# EAGLE board BC40M_nrf53 (EAGLE 9.6.2)
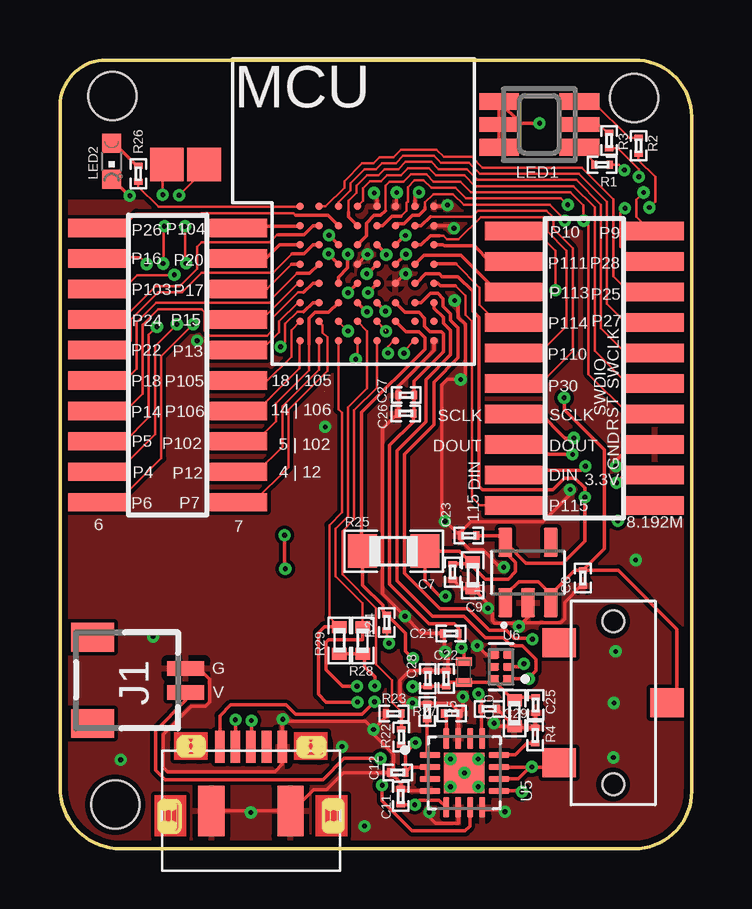
[diagram p0: board, top side]
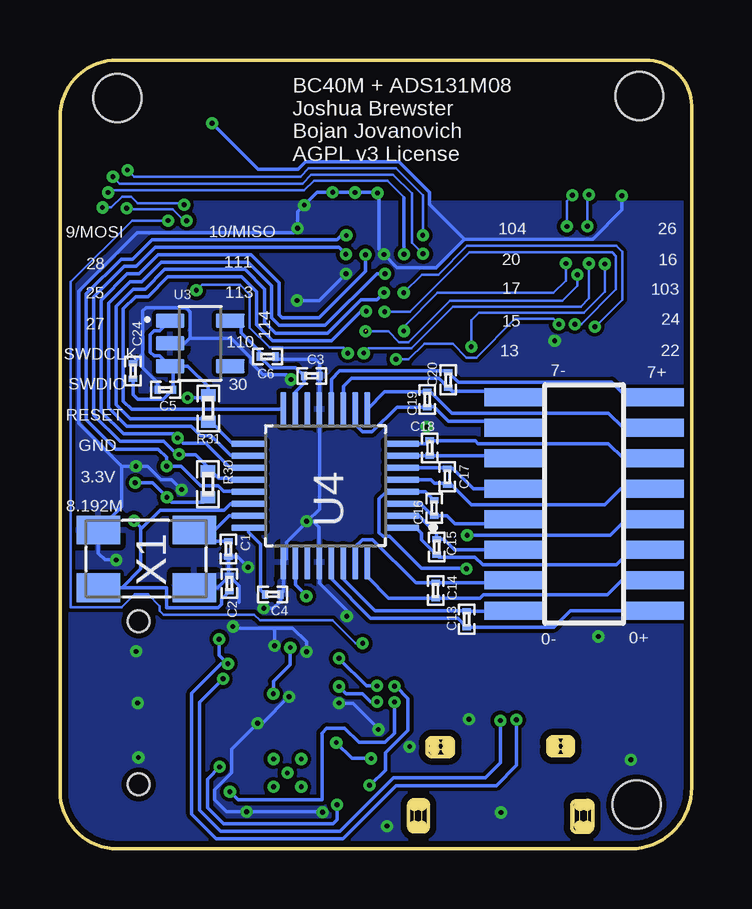
[diagram p1: board, bottom side, seen from below]

Size 26.34 x 32.87 mm. Coordinates in mm from the lower left corner, seen from the top.
Outline: 4.13,1.84 arc-90 4.37,2.02 4.78,2.01 arc-90 5.01,1.78 5.01,0.91 arc-90 4.78,0.68 4.37,0.68 arc-90 4.13,0.96 4.13,1.84
Outline: 10.98,1.81 arc-90 11.21,2.04 11.57,2.04 arc-90 11.8,1.81 11.8,0.93 arc-90 11.57,0.71 11.21,0.71 arc-90 10.98,0.93 10.98,1.81
Outline: 5.16,3.87 arc-90 4.94,4.1 4.94,4.44 arc-90 5.16,4.67 5.78,4.67 arc-90 6.01,4.44 6.01,4.1 arc-90 5.78,3.87 5.16,3.87
Outline: 10.16,3.84 arc-90 9.93,4.07 9.93,4.41 arc-90 10.16,4.64 10.82,4.64 arc-90 11.05,4.41 11.05,4.06 arc-90 10.82,3.84 10.16,3.84
Outline: 0,30.96 arc-90 1.94,32.87 23.94,32.87 arc-90 26.34,30.5 26.34,2.4 arc-90 23.94,0 2.55,0 arc-90 0,2.56 0,30.96
Copper layers (1*16): Top 0.035mm / dielectric 1.5mm / Bottom 0.035mm
Design rules "default *": minimum track width 4mil, minimum drill 0.2mm, track to track 6mil, track to pad 6mil, pad to pad 6mil, via to via 6mil, smd to smd 6mil, copper to edge 10mil, drill to drill 6mil, minimum pad ring 6mil, minimum via ring 6mil, stop-mask expansion 4mil, vias tented up to drill 20mil, thermal gap 10mil
Holes 2 mm at 2.19,31.37 23.94,31.29 2.31,1.84

## Footprints (pad centres in the part's own frame; a part is rotated, then mirrored left to right if it is on the bottom)
0201 = smd 0.25 x 0.35: 1 -0.325,0; 2 0.325,0
0402 = smd 0.5 x 0.6: 1 -0.55,0; 2 0.55,0
1365-20 = smd 0.76 x 2.4: 1 -5.715,-2.95; 2 -5.715,2.95; 3 -4.445,-2.95; 4 -4.445,2.95; 5 -3.175,-2.95; 6 -3.175,2.95; 7 -1.905,-2.95; 8 -1.905,2.95; 9 -0.635,-2.95; 10 -0.635,2.95; 11 0.635,-2.95; 12 0.635,2.95; 13 1.905,-2.95; 14 1.905,2.95; 15 3.175,-2.95; 16 3.175,2.95; 17 4.445,-2.95; 18 4.445,2.95; 19 5.715,-2.95; 20 5.715,2.95
0402_COILCRAFT = smd 0.356 x 0.66: P$1 -0.432,0; P$2 0.432,0
SM02B-SRSS-TB(LF)(SN) = smd 0.6 x 1.55: 1 -0.5,1.975; 2 0.5,1.975 | smd 1.2 x 1.8: 3 -1.8,-1.9; 4 1.8,-1.9
GM5WA94310A = smd 0.7 x 1.65: 1 -0.95,-1.675; 3 0.95,-1.675; 4 0.95,1.675; 6 -0.95,1.675 | smd 0.6 x 1.65: 2 0,-1.675; 5 0,1.675
CHIPLED_0603 = smd 0.8 x 0.8: A 0,-0.75; C 0,0.75
BC40M = smd 0.305 x 0.305: A0 1.168,6.579; A1 1.168,5.766; A2 1.168,4.978; A3 1.168,4.166; A4 1.168,3.378; A5 1.168,2.565; A6 1.168,1.778; A7 1.168,0.965; B0 1.956,6.579; B1 1.956,5.766; B2 1.956,4.978; B3 1.956,4.166; B4 1.956,3.378; B5 1.956,2.565; B6 1.956,1.778; B7 1.956,0.965; C0 2.769,6.579; C1 2.769,5.766; C2 2.769,4.978; C3 2.769,4.166; C4 2.769,3.378; C5 2.769,2.565; C6 2.769,1.778; C7 2.769,0.965; D0 3.556,6.579; D1 3.556,5.766; D2 3.556,4.978; D3 3.556,4.166; D4 3.556,3.378; D5 3.556,2.565; D6 3.556,1.778; D7 3.556,0.965; E0 4.369,6.579; E1 4.369,5.766; E2 4.369,4.978; E3 4.369,4.166; E4 4.369,3.378; E5 4.369,2.565; E6 4.369,1.778; E7 4.369,0.965; F0 5.156,6.579; F1 5.156,5.766; F2 5.156,4.978; F3 5.156,4.166; F4 5.156,3.378; F5 5.156,2.565; F6 5.156,1.778; F7 5.156,0.965; G0 5.969,6.579; G1 5.969,5.766; G2 5.969,4.978; G3 5.969,4.166; G4 5.969,3.378; G5 5.969,2.565; G6 5.969,1.778; G7 5.969,0.965; H0 6.756,6.579; H1 6.756,5.766; H2 6.756,4.978; H3 6.756,4.166; H4 6.756,3.378; H5 6.756,2.565; H6 6.756,1.778; H7 6.756,0.965
TP14SQ = smd 1.4 x 1.4: TP 0,0
0805 = smd 1.2 x 1.4: 1 -1.3,0; 2 1.3,0
CL-SB-12B = smd 1.2 x 1.4: 1 -2.5,-2.25; 2 0,2.25; 3 2.5,-2.25 | hole 0.9: 3.4,0; -3.4,0
SOT95P280X145-5N = smd 1.21 x 0.59: 1 -1.255,0.95; 2 -1.255,0; 3 -1.255,-0.95; 4 1.255,-0.95; 5 1.255,0.95
DX4R005JJ2R1800 = smd 1.35 x 0.4: 1 1.525,1.3; 2 1.525,0.65; 3 1.525,0; 4 1.525,-0.65; 5 1.525,-1.3 | smd 2.1 x 1.1: MP1 -1.15,1.65; MP2 -1.15,-1.65
QFP50P700X700X120-32N = smd 1.44 x 0.26: 1 -3.195,1.75; 2 -3.195,1.25; 3 -3.195,0.75; 4 -3.195,0.25; 5 -3.195,-0.25; 6 -3.195,-0.75; 7 -3.195,-1.25; 8 -3.195,-1.75; 17 3.195,-1.75; 18 3.195,-1.25; 19 3.195,-0.75; 20 3.195,-0.25; 21 3.195,0.25; 22 3.195,0.75; 23 3.195,1.25; 24 3.195,1.75 | smd 0.26 x 1.44: 9 -1.75,-3.195; 10 -1.25,-3.195; 11 -0.75,-3.195; 12 -0.25,-3.195; 13 0.25,-3.195; 14 0.75,-3.195; 15 1.25,-3.195; 16 1.75,-3.195; 25 1.75,3.195; 26 1.25,3.195; 27 0.75,3.195; 28 0.25,3.195; 29 -0.25,3.195; 30 -0.75,3.195; 31 -1.25,3.195; 32 -1.75,3.195
QFN50P300X300X100-17N = smd 0.86 x 0.26: 1 -1.435,0.75; 2 -1.435,0.25; 3 -1.435,-0.25; 4 -1.435,-0.75; 9 1.435,-0.75; 10 1.435,-0.25; 11 1.435,0.25; 12 1.435,0.75 | smd 0.26 x 0.86: 5 -0.75,-1.435; 6 -0.25,-1.435; 7 0.25,-1.435; 8 0.75,-1.435; 13 0.75,1.435; 14 0.25,1.435; 15 -0.25,1.435; 16 -0.75,1.435 | smd 1.68 x 1.68: 17 0,0 | drill 0.2 pad 0.4: 18 0,0; 19 -0.58,0.58; 20 0.58,0.58; 21 -0.58,-0.58; 22 0.58,-0.58
PSON50P145X100X60-6N = smd 0.42 x 0.3: 1 -0.29,0.5 | smd 0.41 x 0.3: 2 -0.295,0; 3 -0.295,-0.5; 4 0.295,-0.5; 5 0.295,0; 6 0.295,0.5
ABM3B-8.000MHZ-B2-T = smd 1.8 x 1.2: 1 -2,-1.2; 2 2,-1.2; 3 2,1.2; 4 -2,1.2
1365-16 = smd 0.76 x 2.4: 1 -4.445,-2.95; 2 -4.445,2.95; 3 -3.175,-2.95; 4 -3.175,2.95; 5 -1.905,-2.95; 6 -1.905,2.95; 7 -0.635,-2.95; 8 -0.635,2.95; 9 0.635,-2.95; 10 0.635,2.95; 11 1.905,-2.95; 12 1.905,2.95; 13 3.175,-2.95; 14 3.175,2.95; 15 4.445,-2.95; 16 4.445,2.95

## Placement (x,y rotation side)
C1  10pF  [0201]  19.32,12.49 270 bottom
C2  10pF  [0201]  19.28,11.05 90 bottom
C3  1uF  [0201]  15.84,19.71 180 bottom
C4  220nF  [0201]  17.48,10.6 0 bottom
C5  1uF  [0201]  21.94,19.13 180 bottom
C6  1uF  [0201]  17.69,20.51 0 bottom
C7  1uF  [0201]  16.37,11.53 90 top
C8  1uF  [0201]  21.8,11.28 90 top
C9  10uF  [0402]  17.21,11.4 90 top
C10  1uF  [0201]  17.9,5.83 180 top
C11  4.7uF  [0201]  14.21,2.18 270 top
C12  4.7uF  [0201]  14.08,3.18 0 top
C13  100pF  [0201]  9.39,9.57 90 bottom
C14  100pF  [0201]  10.68,10.76 90 bottom
C15  100pF  [0201]  10.64,12.58 90 bottom
C16  100pF  [0201]  10.74,14.2 270 bottom
C17  100pF  [0201]  10.19,15.5 90 bottom
C18  100pF  [0201]  10.92,16.7 270 bottom
C19  100pF  [0201]  11.03,18.72 270 bottom
C20  100pF  [0201]  10.15,19.54 270 bottom
C21  0.1uF  [0201]  16.3,8.97 180 top
C22  10nF  [0201]  16.1,7.1 270 top
C23  0.1uF  [0201]  17.04,13.05 0 top
C24  1uF  [0201]  23.29,19.91 270 bottom
C25  4.7uF  [0201]  19.83,6 90 top
C26  4.7uF  [0201]  14.41,18.14 0 top
C27  0.1uF  [0201]  14.43,18.9 0 top
C28  0.1uF  [0201]  15.34,7.09 270 top
C29  10uF  [0402]  18.96,5.65 90 top
HDR1  1365-20  [1365-20]  4.49,20.15 270 top
HDR2  1365-20  [1365-20]  21.86,20.02 270 top
I1  120Ω/500mAh  [0402_COILCRAFT]  16.85,7.37 270 top
J1  SM02B-SRSS-TB(LF)(SN)  [SM02B-SRSS-TB(LF)(SN)]  3.27,7.02 270 top
LED1  GM5WA94310A  [GM5WA94310A]  19.98,30.19 90 top
LED2  [CHIPLED_0603]  2.15,28.65 180 top
MCU  BC40M  [BC40M]  8.84,20.2 0 top
NFC1  TPTP14SQ  [TP14SQ]  6.01,28.51 180 top
NFC2  TPTP14SQ  [TP14SQ]  4.46,28.51 0 top
R1  3.3kΩ  [0201]  22.6,28.5 180 top
R2  3.3kΩ  [0201]  24.12,29.29 90 top
R3  3.3kΩ  [0201]  22.9,29.51 90 top
R4  1.18kΩ  [0201]  19.82,4.71 270 top
R5  1.13kΩ  [0201]  16.33,5.64 180 top
R22  348kΩ  [0201]  14.23,4.66 90 top
R23  750kΩ  [0201]  13.92,5.63 180 top
R24  100kΩ  [0201]  13.63,9.43 90 top
R25  0Ω  [0805]  13.91,12.4 0 top
R26  3.3kΩ  [0201]  3.27,28.13 90 top
R27  10kΩ  [0201]  15.31,5.72 270 top
R28  10kΩ  [0402]  12.62,8.68 90 top
R29  10kΩ  [0402]  11.65,8.69 90 top
R30  100kΩ  [0402]  20.17,15.19 270 bottom
R31  100kΩ  [0402]  20.16,18.35 90 bottom
S1  CL-SB-12B-01T  [CL-SB-12B]  23.06,6.08 270 top
U1  LP5907MFX-3.3/NOPB  [SOT95P280X145-5N]  19.51,11.51 90 top
U2  DX4R005JJ2R1800  [DX4R005JJ2R1800]  7.96,2.73 90 top
U3  LP5907MFX-3.3/NOPB  [SOT95P280X145-5N]  20.5,21.06 0 bottom
U4  ADS131M08IPBS  [QFP50P700X700X120-32N]  15.28,15.13 180 bottom
U5  BQ24072RGTR  [QFN50P300X300X100-17N]  16.86,3.16 0 top
U6  TPD4S012DRYR  [PSON50P145X100X60-6N]  18.39,7.58 180 top
X1  ABM3B-8.000MHZ-B2-T  [ABM3B-8.000MHZ-B2-T]  22.74,12.08 180 bottom
X5  1365-16  [1365-16]  4.49,14.37 90 bottom

## Library data of the parts
C1-C29 R1-R3 R5 R22-R31 = standardparts
HDR1 HDR2 X5 = con-leotronics; OC_FARNELL: unknown; OC_NEWARK: unknown
I1 = spkfncoils; MOUSER_PART: 994-0402HP-12NXGLU; PROD_ID: NDUC-15271
J1 = SM02B-SRSS-TB_LF__SN_; AVAILABILITY: In Stock; DESCRIPTION: Connector Header Surface Mount, Right Angle 2 position 0.039 (1.00mm); MF: JST Sales; MP: SM02B-SRSS-TB(LF)(SN); PACKAGE: None; PRICE: None
LED1 = led
LED2 = adafruit
MCU = BC40M-V0-lib2
NFC1 NFC2 = testpad
R4 = standardparts; SPICEPREFIX: R
S1 = CL-SB-12B-01T; AVAILABILITY: In Stock; DESCRIPTION: Slide Switch SPDT Surface Mount; MF: Nidec Copal; MP: CL-SB-12B-01T; PACKAGE: None; PRICE: None
U1 U3 = LP5907MFX-3.3_NOPB; AVAILABILITY: Unavailable; DESCRIPTION: Linear Voltage Regulator IC 1 Output 250mA SOT-23-5; MF: Texas Instruments; MP: LP5907MFX-3.3/NOPB; PACKAGE: SOT-23 Texas Instruments; PRICE: None
U2 = DX4R005JJ2R1800; AVAILABILITY: In Stock; DESCRIPTION: USB - micro B USB 2.0 Receptacle Connector 5 Position Surface Mount, Right Angle; Through Hole; MF: JAE Electronics; MP: DX4R005JJ2R1800; PACKAGE: None; PRICE: None
U4 = ADS131M08IPBS; AVAILABILITY: Warning; DESCRIPTION: 24-bit 32-kSPS 8-channelsimultaneous-sampling delta-sigma ADC 32-TQFP -40 to 125; MF: Texas Instruments; MP: ADS131M08IPBS; PACKAGE: TQFP-32 Texas Instruments; PRICE: None; PURCHASE-URL: https://pricing.snapeda.com/search/part/ADS131M08IPBS/?ref=eda
U5 = BQ24072RGTR; AVAILABILITY: In Stock; DESCRIPTION: Standalone 1-cell 1.5-A linear charger, Power Path, 4.2-V VBAT and VOUT=VBAT + 225mV 16-VQFN -40 to 85; MF: Texas Instruments; MP: BQ24072RGTR; PACKAGE: VQFN-16 Texas Instruments; PRICE: None; PURCHASE-URL: https://pricing.snapeda.com/search/part/BQ24072RGTR/?ref=eda
U6 = TPD4S012DRYR; AVAILABILITY: In Stock; DESCRIPTION: 4-channel USB ESD solution with power clamp 6-SON -40 to 85; MF: Texas Instruments; MP: TPD4S012DRYR; PACKAGE: USON-6 Texas Instruments; PRICE: None; PURCHASE-URL: https://pricing.snapeda.com/search/part/TPD4S012DRYR/?ref=eda
X1 = Crystals_Oscillators; CREATED_BY: PCBLayout.com; DIGIKEY_PART_NUMBER: 535-9720-2-ND; MANUFACTURER: Abracon LLC; MPN: ABM3B-8.000MHZ-B2-T; PACKAGE: SMD 4

## Nets
0N: C13.2 U4.30 X5.2
0P: C13.1 U4.29 X5.1
1N: C14.2 U4.31 X5.4
1P: C14.1 U4.32 X5.3
2N: C15.2 U4.2 X5.6
2P: C15.1 U4.1 X5.5
3N: C16.2 U4.3 X5.8
3P: C16.1 U4.4 X5.7
4N: C17.2 U4.6 X5.10
4P: C17.1 U4.5 X5.9
5N: C18.2 U4.7 X5.12
5P: C18.1 U4.8 X5.11
6N: C19.2 U4.10 X5.14
6P: C19.1 U4.9 X5.13
7N: C20.2 U4.11 X5.16
7P: C20.1 U4.12 X5.15
+5V: C22.2 C25.2 C28.2 C29.2 I1.P$2 U2.1 U6.6
+5V_ISO: C10.2 C21.1 C26.2 C27.2 I1.P$1 MCU.F5 U5.13
AVDD: C3.2 C6.1 U3.5 U4.15
BAT: C12.2 J1.2 R22.1 U5.2 U5.3
CAP: C4.1 U4.24
CHG: MCU.C7 R29.2 U5.9
CLKIN: C1.1 U4.23 X1.1
CLKOUT: C2.1 HDR2.20 U4.22 X1.3
CS: MCU.E4 R31.1 U4.17
CUR_DETECT: MCU.E7 R22.2 R23.1
D+: MCU.H5 U2.3 U6.1
D-: MCU.G5 U2.2 U6.2
DIN: HDR2.17 MCU.F2 U4.21
DOUT: HDR2.15 MCU.F3 R30.1 U4.20
DRDY: MCU.E3 U4.18
GND: C1.2 C2.2 C3.1 C4.2 C5.2 C6.2 C7.1 C8.1 C9.1 C10.1 C11.1 C12.1 C21.2 C22.1 C23.1 C24.1 C25.1 C26.1 C27.1 C28.1 C29.1 HDR2.16 J1.1 LED1.4 LED1.5 LED1.6 LED2.C MCU.D3 MCU.E0 MCU.F0 MCU.F4 MCU.G0 MCU.H0 MCU.H1 MCU.H7 R4.1 R5.1 R23.2 R27.1 U1.2 U2.5 U2.MP1 U2.MP2 U3.2 U4.13 U4.25 U4.28 U5.4 U5.6 U5.8 U5.15 U6.4 X1.2 X1.4
ID: U2.4
ILM: R4.2 U5.12
ISET: R5.2 U5.16
LED5: LED2.A R26.2
N$1: LED1.2 R3.2
N$2: LED1.3 R2.2
N$3: LED1.1 R1.2
NFC1: MCU.F7 NFC2.TP
NFC2: MCU.C6 NFC1.TP
P4_AIN0: HDR1.17 MCU.D5
P5_AIN1: HDR1.15 MCU.D4
P6_AIN2: HDR1.19 MCU.D7
P7_AIN3: HDR1.20 MCU.B6
P9_MOSI: HDR2.2 MCU.C4
P10_MISO: HDR2.1 MCU.G7
P12: HDR1.18 MCU.B7
P13: HDR1.10 MCU.A5
P14: HDR1.13 MCU.B4
P15: HDR1.8 MCU.A4
P16: HDR1.3 MCU.B5
P17: HDR1.6 MCU.A3
P18: HDR1.11 MCU.B3
P19: MCU.C3 R3.1
P20: HDR1.4 MCU.A2
P21: MCU.C2 R1.1
P22: HDR1.9 MCU.B2
P24: HDR1.7 MCU.B1
P25_AIN4: HDR2.6 MCU.B0
P26_AIN5: HDR1.1 MCU.C1
P27_AIN6: HDR2.8 MCU.C0
P28_AIN7: HDR2.4 MCU.F1
P29: MCU.E1 R2.1
P30: HDR2.11 MCU.G1
P102: HDR1.16 MCU.C5
P103: HDR1.5 MCU.E6
P104: HDR1.2 MCU.A1
P105: HDR1.12 MCU.A6
P106: HDR1.14 MCU.A7
P109: MCU.A0 R26.1
P110: HDR2.9 MCU.G2
P111: HDR2.3 MCU.H2
P113: HDR2.5 MCU.G3
P114: HDR2.7 MCU.H3
P115: HDR2.19 MCU.H4
PGOOD: MCU.D6 R28.2 U5.7
RESET: HDR2.14 MCU.D2 R24.1
SCLK: HDR2.13 MCU.E2 U4.19
SWDCLK: HDR2.10 MCU.D1
SWDIO: HDR2.12 MCU.D0
SYNC/RESET: MCU.E5 U4.16
TMR: U5.14
TS: R27.2 U5.1
VDD: C7.2 C9.2 C23.2 HDR2.18 MCU.G4 R25.2 R30.2 U1.5 U4.26
VDDH: MCU.F6 R24.2 R25.1 R28.1 R29.1
VIN: C5.1 C8.2 C24.2 R31.2 S1.2 U1.1 U1.3 U3.1 U3.3
VSWITCH: C11.2 S1.3 U5.5 U5.10 U5.11

## Tracks (layer width: path | path; a pad name or v marks a point on that pad's centre or on a via)
0N
  Bottom 0.152: X5.2 7.48,9.92 7.5,9.91 9.37,9.91 C13.2 9.41,9.92 13.21,9.92 14.53,11.24 U4.30
0P
  Bottom 0.152: X5.1 5.06,9.92 5.74,9.24 C13.1 | U4.29 15.03,11.24 13.39,9.6 9.75,9.6 C13.1 | C13.1
1N
  Bottom 0.152: X5.4 7.55,11.09 C14.2 11.5,11.09 13.3,12.88 13.73,12.88 14.05,12.57 14.05,11.96 U4.31
1P
  Bottom 0.152: U4.32 13.53,11.33 12.64,10.44 C14.1 8.83,10.44 8.68,10.59 3.51,10.59 2.91,11.19 X5.3
2N
  Bottom 0.152: U4.2 11.37,13.89 11.13,13.65 11.13,13.63 10.64,13.13 C15.2 10.33,12.9 9.89,12.46 X5.6
2P
  Bottom 0.152: X5.5 2.52,12.46 3.15,11.83 8.72,11.83 9.03,12.15 10.54,12.15 C15.1 11.26,12.87 11.26,13.14 11.5,13.38 U4.1
3N
  Bottom 0.152: X5.8 8.4,13.73 8.59,13.55 9.87,13.55 10.01,13.68 10.2,13.87 C16.2 10.8,13.87 11.33,14.4 12.06,14.4 U4.3
3P  (via drill 0.2)
  Top 0.152: v9.4,11.67 9.36,11.7 v9.36,13.06
  Bottom 0.152: v9.36,13.07 3.39,13.07 2.73,13.73 X5.7 | v9.36,13.07 | C16.1 11.1,14.88 U4.4 12.73,14.88 13.03,14.59 13.03,13.18 12.88,13.02 12.61,13.02 11.27,11.68 v9.4,11.68 v9.4,11.67 | v9.36,13.06 v9.36,13.07
4N
  Bottom 0.152: 8.28,14.98 8.2,15.06 7.49,15.06 X5.10 9.11,15 9.97,15.86 10.15,15.86 C17.2 10.23,15.87 12.07,15.87 U4.6
4P
  Bottom 0.152: X5.9 2.96,15 3.62,14.34 9.19,14.34 10.02,15.18 C17.1 10.24,15.22 10.72,15.22 10.88,15.38 U4.5
5N
  Bottom 0.152: 11.21,16.38 | U4.7 11.21,16.38 | X5.12 8.36,16.27 8.46,16.38 C18.2 11.21,16.38
5P  (1 unrouted)
  Bottom 0.152: X5.11 2.86,16.27 3.47,16.88 8.91,16.88 9.03,17 10.89,17 C18.1 | U4.8 11.11,16.88 10.97,17.03
6N  (1 unrouted)
  Bottom 0.152: C19.2 11.01,18.42 10.75,18.42 10.15,17.81 7.71,17.81 X5.14 | U4.10 14.03,17.67 13.73,17.38 13.32,17.38 12.29,18.41 11.04,18.41
6P  (1 unrouted)
  Bottom 0.152: X5.13 2.86,17.54 3.47,18.15 9.99,18.15 10.89,19.04 C19.1 | U4.9 12.81,19.05 C19.1
7N
  Bottom 0.102: 8.22,18.81 X5.16 | C20.2 10.13,19.19
  Bottom 0.152: U4.11 14.53,19.27 14.19,19.6 10.54,19.6 C20.2 10.01,19.07 8.48,19.07 8.22,18.81
7P
  Bottom 0.152: U4.12 15.03,19.58 14.69,19.92 10.21,19.92 C20.1 9.73,19.44 3.34,19.44 2.71,18.81 X5.15
+5V  (via drill 0.2)
  Top 0.102: C25.2 19.8,6.29
  Top 0.152: v14.71,6.76 C28.2 15.35,6.77 C22.2 16.26,6.93 16.84,6.93 I1.P$2 17.96,6.94 U6.6 18.24,6.93 18.24,6.86 18.9,6.2 C29.2 19.08,6.32 C25.2 | U2.1 6.67,5.55 7.12,6 9.43,6 9.82,5.61 12.6,5.61 v13.12,6.13
  Bottom 0.152: v14.71,6.76 14.41,6.46 13.74,6.46 13.4,6.13 v13.12,6.13
+5V_ISO  (via drill 0.2)
  Top 0.152: MCU.F5 14.39,22.36 14.96,22.36 15.21,22.12 15.21,21.77 15.44,21.54 15.91,21.54 15.98,21.47 15.98,20.72 14.76,19.49 C27.2 | U5.13 17.57,4.64 C10.2 | C10.2 17.57,6.34 v17.45,6.46 | C27.2 | C27.2 14.76,18.16 C26.2 14.74,17.8 13.75,16.81 13.75,11.02 15.38,9.39 16.45,9.39 16.62,9.21 C21.1 16.64,8.96 16.64,8.75 16.85,8.54 I1.P$1 16.85,8.28 v16.74,8.38 | C10.2
  Bottom 0.152: v17.45,6.46 v17.44,6.46 17.44,6.98 16.76,7.67 16.76,8.37 v16.74,8.38
AVDD
  Bottom 0.152: U4.15 16.53,19.04 16.17,19.4 C3.2 16.51,20.05 17.55,20.05 C6.1 18.01,20.73 18.78,21.5 18.78,21.68 18.78,21.94 18.78,21.97 18.82,22.01 U3.5
BAT  (via drill 0.2)
  Top 0.152: U5.3 15.29,3.05 15.29,3.28 U5.2 15.41,3.39 14.62,3.39 C12.2 14.41,4.16 | 14.41,4.16 R22.1 | J1.2 5.24,6.19 3.98,4.93 3.98,3.28 4.38,2.89 10.96,2.89 11.84,3.76 v13.37,3.76 | v14.82,4.43 14.55,4.16 14.41,4.16
  Bottom 0.152: v13.37,3.76 14.16,3.76 v14.82,4.43
CAP
  Bottom 0.152: U4.24 18.47,13.2 17.98,12.7 17.98,10.78 C4.1
CHG  (via drill 0.2)
  Top 0.102: 11.65,9.26 R29.2 11.23,9.65 11.23,13.49 11.76,14.02 11.76,18.16 11.61,18.31 MCU.C7
  Top 0.152: U5.9 19.26,2.41 v19.26,2.38 | v12.4,6.11 11.1,6.11 10.78,6.43 10.78,9.01 11.03,9.26 11.65,9.26
  Bottom 0.152: v19.26,2.38 18.92,2.04 15.42,2.04 15.42,4.82 15.22,5.03 14.48,5.03 13.88,4.43 12.78,4.43 12.4,4.82 v12.4,6.11
CLKIN
  Bottom 0.152: U4.23 19.3,13.88 19.89,13.28 X1.1 20.28,12.82 C1.1
CLKOUT  (via drill 0.2)
  Top 0.152: v23.26,13.68 23.29,13.68 23.92,14.31 HDR2.20
  Bottom 0.152: C2.1 19.61,10.39 19.61,10.19 19.75,10.05 21.9,10.05 21.9,10.88 X1.3 23.76,10.88 22.97,11.67 22.97,13.31 | 22.97,13.31 22.97,13.39 v23.26,13.68 | U4.22 19.24,14.38 19.5,14.11 22.17,14.11 22.97,13.31
CS  (via drill 0.2)
  Top 0.152: MCU.E4 13.21,23.55 v12.84,23.18
  Bottom 0.152: v12.84,23.18 13.13,22.88 13.78,22.88 15.18,21.49 17.36,21.49 17.82,21.95 17.82,23.32 18.63,24.14 21.98,24.14 22.8,23.32 23.3,23.32 24.01,22.61 24.01,18.51 23.42,17.92 20.17,17.92 | 20.17,17.92 19.16,16.9 18.49,16.9 U4.17 | R31.1 20.17,17.81 20.17,17.92
CUR_DETECT
  Top 0.102: 14.17,5.71 R23.1 14.25,5.7 13.85,6.1 13.85,7.03 13.19,7.7 13.19,10.03 11.77,11.44 11.77,13.23 12.27,13.73 12.27,18.27 13.21,19.22 MCU.E7
  Top 0.152: R23.1 14.25,5 R22.2
D+  (via drill 0.2)
  Top 0.152: MCU.H5 15.6,22.52 15.98,22.14 15.98,21.9 16.29,21.6 16.29,20.58 15.26,19.55 15.26,17.8 14.05,16.59 14.05,11.17 15.53,9.7 16.84,9.7 17.74,8.8 18.49,8.8 18.81,8.48 18.96,8.48 18.97,8.47 19.28,8.47 19.85,7.89 19.85,7.41 19.52,7.08 | 19.52,7.08 U6.1 | 19.52,7.08 19.52,7.07 19.53,7.06 v19.55,7.08 | v7.98,5.34 7.98,4.27 U2.3
  Bottom 0.152: v7.98,5.34 7.98,3.58 8.6,2.96 12.44,2.96 14.67,0.73 19.65,0.73 20.53,1.61 20.53,6.1 v19.55,7.08
D-  (via drill 0.2)
  Top 0.152: MCU.G5 15.06,22.76 15.44,23.14 15.76,23.14 15.98,22.92 15.98,22.6 16.29,22.29 16.29,22.03 16.6,21.72 16.6,20.45 15.59,19.45 15.59,17.67 14.36,16.44 14.36,11.48 15.84,10.01 17,10.01 17.91,9.1 18.62,9.1 18.93,8.78 18.99,8.78 19,8.78 19.67,8.78 19.7,8.75 v19.7,8.73 | v19.34,7.72 19.29,7.72 19.15,7.58 U6.2 | v7.32,5.37 U2.2
  Bottom 0.152: v7.32,5.37 7.32,3.47 8.15,2.64 12.33,2.64 14.55,0.41 19.82,0.41 20.85,1.44 20.85,6.48 19.62,7.72 v19.34,7.72 19.7,8.07 v19.7,8.73
DIN  (via drill 0.2)
  Top 0.102: HDR2.17 19.97,15.58 20.17,15.77
  Top 0.152: MCU.F2 14.38,25.56 v14.4,25.56 | v21.9,15.94 21.73,15.77 20.17,15.77
  Bottom 0.152: v14.4,25.56 14.61,25.56 14.79,25.37 22.5,25.37 23.3,24.57 23.8,24.57 25.24,23.12 25.24,17.88 24.02,16.66 22.24,16.66 21.9,16.32 v21.9,15.94 21.29,15.94 20.48,15.13 19.75,15.13 19.52,14.89 18.48,14.89 U4.21
DOUT  (via drill 0.2)
  Top 0.102: HDR2.15 19.92,16.85 20.01,16.76
  Top 0.152: MCU.F3 14.4,24.76 14.41,24.76 v14.42,24.77 | v21.37,16.43 20.34,16.43 20.01,16.76
  Bottom 0.152: v14.42,24.77 14.71,25.06 22.37,25.06 23.17,24.26 23.67,24.26 24.93,23.01 24.93,18.06 23.84,16.97 22.01,16.97 21.47,16.43 v21.37,16.43 21.36,16.42 20.69,16.42 20.13,15.85 | 20.13,15.85 19.72,15.45 19.3,15.45 19.24,15.38 U4.20 | R30.1 20.13,15.78 20.13,15.85
DRDY  (via drill 0.2)
  Top 0.152: MCU.E3 12.82,23.97 v12.79,23.97
  Bottom 0.152: v12.79,23.97 13.13,23.97 15.29,21.81 17.2,21.81 17.51,22.12 17.51,23.45 18.5,24.45 22.12,24.45 22.93,23.64 23.42,23.64 24.32,22.74 24.32,18.38 23.55,17.62 20.87,17.62 20.48,17.22 20.04,17.22 19.22,16.4 18.49,16.4 U4.18
GND  (via drill 0.2)
  Top 0.152: MCU.H1 16.29,25.96 16.4,25.86 v16.43,25.86 | v16.16,26.82 16.11,26.77 MCU.H0 | MCU.E0 13.21,27.22 v13.1,27.33 | v14.04,27.35 14.04,26.82 MCU.F0 | MCU.G0 14.81,27.2 v14.97,27.36 | MCU.F4 14.39,23.97 v14.42,23.97 | MCU.D3 12.8,24.77 v12.83,24.77 | 15.59,21.15 MCU.H7 15.6,20.76 14.11,19.28 C27.1 14.11,18.16 C26.1 13.44,17.5 13.44,10.62 14.3,9.76 | v21.27,14.97 21.27,14.75 20.14,13.63 17.13,13.63 16.72,13.21 C23.1 | 14.3,9.76 15.08,8.99 15.97,8.99 C21.2 16.03,8.92 16.03,8.21 v16.06,8.21 16.17,8.1 16.17,7.42 C22.1 15.73,7.42 | 15.73,7.42 15.61,7.42 15.6,7.42 C28.1 | 9.26,5.31 U2.5 9.26,3.52 8.96,3.22 4.49,3.22 4.3,3.41 4.3,4.75 5.48,5.93 6.08,5.93 6.25,6.1 6.25,7.07 5.8,7.52 J1.1 | v13.07,4.97 12.74,5.31 9.26,5.31 | U5.15 16.61,5.59 R5.1 | R5.1 16.66,5.68 16.28,6.07 15.33,6.07 R27.1 15.28,6.07 v14.7,6.07 14.33,6.07 14.18,6.22 14.18,7.02 14.58,7.42 C28.1 | C12.1 13.9,3.32 13.9,3.93 13.07,4.77 v13.07,4.97 | R23.2 13.6,5.5 v13.07,4.97 | C23.1 16.67,13.05 16.08,13.64 v16.06,13.64 16.06,13.69 15.93,13.81 15.93,19.34 16.15,19.56 v16.71,19.56 16.9,19.75 16.9,21.85 16.59,22.15 16.59,22.73 16.48,22.84 v16.46,22.84 | v18.5,11.74 18.35,11.74 17.63,12.45 17.09,12.45 16.72,12.83 C23.1 | U5.6 16.61,1.06 15.66,1.06 15.4,1.33 v15.4,1.53 | U5.8 17.71,1.63 18.48,1.63 v18.56,1.55 | C10.1 C29.1 | C29.1 19.02,5.04 R4.1 19.83,5.05 C25.1 | C29.1 18.24,5.1 v18.1,5.24 | v16.79,6.33 16.79,5.78 R5.1 | U1.2 | C7.1 16.38,11.2 16.74,10.85 C9.1 17.85,10.22 v17.85,10.02 17.85,10 18.02,9.82 18.02,9.51 18.12,9.41 19.13,9.41 v19.13,9.26 | HDR2.16 24.7,16.74 23.75,16.74 23.18,16.16 v23.18,15.94 | 2.15,28.02 LED2.C 2.18,27.9 2.88,27.21 v2.91,27.21
  Top 0.152: C28.1 15.73,7.42 | U2.MP1 U2.MP2 9.69,1.58 10.57,2.46 11.11,2.46 11.83,3.18 C12.1 | C8.1 21.72,10.96 21.05,10.28 21.05,9.58 20.89,9.42 19.17,9.42 19.13,9.38 v19.13,9.26 | C12.1 14.21,2.72 C11.1 14.31,2.41 U5.4 | LED1.6 LED1.5 LED1.4 19.21,30.23 v20,30.23 | v14.38,9.7 14.31,9.76 14.3,9.76 | 19.45,9.82 19.52,9.82 U1.2 | U1.2 19.52,9.65 v19.13,9.26 | v17.4,8.46 17.78,8.08 U6.4 | v9.29,5.4 9.29,5.33 9.26,5.31
  Bottom 0.152: v16.43,25.86 16.43,26.55 v16.16,26.82 15.62,27.36 v14.97,27.36 14.06,27.36 v14.04,27.35 13.12,27.35 v13.1,27.33 13.04,27.26 13.04,24.98 v12.83,24.77 12.28,24.22 10.67,24.22 9.48,25.41 | v16.46,22.84 15.54,22.84 v14.42,23.96 v14.42,23.97 | v16.43,25.86 16.45,25.88 | U3.2 21.14,21.06 20.93,21.27 | 23.76,15.94 23.77,15.94 23.77,14.25 X1.2 24.74,12.33 24.45,12.03 v24,12.03 | 23.76,15.94 v23.18,15.94 22.68,15.94 22.12,15.38 21.68,15.38 v21.27,14.97 | X1.4 19.77,10.88 C2.2 | C2.2 19.32,11.42 C1.2 18.94,12.17 v18.5,11.74 | v16.06,8.21 16.06,8.62 16.64,9.19 17.34,9.19 | v19.14,9.26 v19.13,9.26 19.06,9.19 17.34,9.19 | C5.2 22.27,19.43 22.89,20.05 22.89,20.64 | 22.89,20.64 22.89,20.95 22.9,20.96 22.9,22.41 22.76,22.55 21.09,22.55 20.92,22.37 20.92,21.28 20.93,21.27 | C24.1 22.89,20.64 | v15.4,1.53 15.42,1.55 v18.56,1.55 19.4,1.55 19.89,2.04 19.89,2.47 19.19,3.16 19.19,4.14 v18.1,5.23 v18.1,5.24 17.9,5.24 v16.81,6.33 v16.79,6.33 | v14.7,6.07 14.13,6.07 13.07,5.01 v13.07,4.97 | C6.2 17.24,20.39 15.68,20.39 15.52,20.23 C3.1 U4.13 15.53,14.16 16.04,13.64 v16.06,13.64 | 22.89,20.57 22.89,22.09 | v16.71,19.56 16.9,19.75 17.87,19.75 18.36,20.24 18.36,20.43 19.2,21.27 20.93,21.27 | 9.48,25.41 4.13,25.41 2.91,26.62 v2.91,27.21 | v16.43,25.86 16.61,25.68 23.12,25.68 25.39,23.41 | 25.4,23.41 25.39,23.41 | 25.39,23.41 25.56,23.24 25.56,17.74 23.76,15.94 | 18.87,10.28 18.87,10.96 C2.2 | v20,30.23 18.08,28.31 16.41,28.31 16.1,28.63 12.21,28.63 10.93,27.35 10.93,26.86 9.48,25.41 | v14.38,9.7 14.38,9.92 15.53,11.06 U4.28 15.54,13.39 15.79,13.64 v16.06,13.64 | v16.06,13.64 16.06,13.6 16.89,12.77 16.89,12.08 U4.25 17.03,10.73 C4.2 17.15,10.32 17.46,10.02 v17.85,10.02
  Bottom 0.152: v17.4,8.46 17.4,9.13 17.34,9.19
  other vias: 11.06,17.58 3.89,8.85 2.54,3.71 23.07,3.8 5.72,21.17 7.96,1.51 12.7,0.95 23.1,6.08 23.16,8.22 11.76,4.26
  pour Bottom: -1.4,-1.95 27.94,-1.95 31.18,1.29 31.18,26.95 -3.33,26.95 -3.33,-0.03
  pour Top: -1.57,-1.51 -3.19,0.1 -3.19,26.97 30.94,26.97 30.94,1.46 27.96,-1.51
ILM
  Top 0.152: R4.2 19.47,4.39 18.99,3.92 U5.12
ISET
  Top 0.152: U5.16 16.11,5.54 R5.2
LED5
  Top 0.152: R26.2 3.2,28.45 2.26,29.4 LED2.A
N$1
  Top 0.102: R3.2 22.82,29.84 22.37,30.28 21.75,30.28 LED1.2
N$2
  Top 0.102: R2.2 23.74,29.62 22.23,31.14 LED1.3
N$3
  Top 0.102: LED1.1 22.28,28.61 R1.2
NFC1  (via drill 0.2)
  Top 0.102: MCU.F7 13.91,21.16 13.68,20.92 v13.68,20.66 | v4.3,24.39 4.33,24.42 4.33,25.91 v4.36,25.94 | v4.29,27.25 4.29,28.34 NFC2.TP
  Bottom 0.102: v13.68,20.66 13.47,20.86 11.7,20.86 9.97,22.59 4.63,22.59 4.28,22.94 4.28,24.38 v4.3,24.39 | v4.36,25.94 4.36,27.18 v4.29,27.25
NFC2  (via drill 0.2)
  Top 0.102: MCU.C6 v12.01,21.58 | v5.21,25.93 5.21,24.43 v5.25,24.39 | v4.97,27.23 6.01,28.27 NFC1.TP
  Bottom 0.102: v12.01,21.58 12.01,21.75 10.6,23.16 5.77,23.16 5.25,23.68 v5.25,24.39 | v5.21,25.93 5.21,26.99 v4.97,27.23
P4_AIN0  (via drill 0.2)
  Top 0.102: v4.88,21.86 3.96,20.95 3.96,17.27 2.4,15.71 HDR1.17
  Top 0.152: MCU.D5 12.78,22.38 v12.8,22.38
  Bottom 0.102: v12.8,22.38 11.75,22.38 9.27,24.85 3.31,24.85 3.16,24.7 3.16,23.31 4.61,21.86 v4.88,21.86
  Bottom 0.152: v12.8,22.38 v12.81,22.37
P5_AIN1  (via drill 0.2)
  Top 0.102: v4.04,21.76 3.71,21.42 3.71,17.97 2.71,16.98 HDR1.15
  Top 0.152: MCU.D4 12.01,23.19 v12.01,23.16
  Bottom 0.102: v12.01,23.16 11.25,23.93 10.57,23.93 9.37,25.12 3.14,25.12 2.9,24.88 2.9,22.88 4.02,21.76 v4.04,21.76
P6_AIN2  (via drill 0.2)
  Top 0.102: v5.54,21.86 4.22,20.53 4.22,16.27 2.39,14.44 HDR1.19 | v12.33,20.4 12.4,20.47 MCU.D7
  Bottom 0.102: v5.54,21.86 5.76,22.08 7.37,22.08 8.98,20.47 9.38,20.47 9.95,21.04 11.15,21.04 11.8,20.39 12.32,20.39 v12.33,20.4
P7_AIN3
  Top 0.102: MCU.B6 10.95,21.82 10.95,21.51 11.15,21.31 11.15,19.93 9.53,18.3 9.53,15.91 8.06,14.44 HDR1.20
P9_MOSI  (via drill 0.2)
  Top 0.102: v24.33,27.35 24.04,27.05 24.04,26.33 24.64,25.74 HDR2.2
  Top 0.152: MCU.C4 11.61,23.82 11.99,24.2 11.99,24.77 v12,24.78
  Bottom 0.102: 12,27.12 12,27.15 12.69,27.84 15.76,27.84 16.16,27.43 24.25,27.43 v24.33,27.35
  Bottom 0.152: v12,24.78 12,27.12
P10_MISO  (via drill 0.2)
  Top 0.102: MCU.G7 14.77,21.16 14.34,20.74 v14.34,20.65 | v20.65,23.27 20.65,24.91 19.78,25.79 18.97,25.79 HDR2.1
  Bottom 0.102: v14.34,20.65 14.34,20.72 14.51,20.89 17.06,20.89 17.6,20.89 18.43,21.72 18.43,23.1 18.84,23.51 20.42,23.51 v20.65,23.27
P12
  Top 0.102: MCU.B7 10.8,19.95 9.28,18.43 9.28,16.76 8.23,15.71 HDR1.18
P13
  Top 0.102: MCU.A5 9.92,22.76 9.14,21.98 9.14,21.52 8.41,20.79 HDR1.10
P14
  Top 0.102: 10.16,23.18 9.92,23.18 8.88,22.14 8.88,21.62 8.63,21.37 6.25,21.37 6.04,21.59 6.04,22.35 5.9,22.48 4.1,22.48 3.45,21.83 3.45,18.97 2.72,18.24 2.71,18.25 HDR1.13
  Top 0.152: MCU.B4 10.55,23.57 10.16,23.18
P15
  Top 0.102: HDR1.8 8.43,22.06 9.95,23.58
  Top 0.152: MCU.A4 9.95,23.58
P16  (via drill 0.2)
  Top 0.102: v9.19,20.92 9.4,21.13 9.4,21.87 9.9,22.37 10.16,22.37 | v3.62,24.37 3.34,24.64 2.63,24.64 2.59,24.6 HDR1.3
  Top 0.152: MCU.B5 10.55,22.76 10.16,22.37
  Bottom 0.102: v3.62,24.37 3.62,23.21 4.49,22.34 8.88,22.34 9.19,22.03 v9.19,20.92
P17
  Top 0.102: HDR1.6 8.64,23.33 9.66,24.36
  Top 0.152: MCU.A3 9.66,24.36
P18
  Top 0.102: 9.89,23.97 8.87,22.95 8.87,22.87 8.74,22.74 4,22.74 3.2,21.94 3.2,20.01 2.73,19.55 2.68,19.55 | 2.68,19.55 2.62,19.55 | HDR1.11 2.65,19.52 2.68,19.55
  Top 0.152: 9.89,23.97 10.41,23.97 MCU.B3
P19  (via drill 0.2)
  Top 0.102: R3.1 23.26,29.19 24.13,28.32 v24.13,28
  Top 0.152: MCU.C3 11.2,24.77 v11.2,24.79
  Bottom 0.102: v11.2,24.79 11.67,25.26 11.67,27.31 12.46,28.09 15.87,28.09 16.24,27.72 23.86,27.72 v24.13,28
P20
  Top 0.102: HDR1.4 8.14,24.6 8.19,24.65
  Top 0.152: MCU.A2 9.15,25.17 8.63,24.65 8.19,24.65 8.16,24.65
P21  (via drill 0.2)
  Top 0.102: R1.1 23.3,28.5 v23.53,28.28
  Top 0.152: MCU.C2 v11.22,25.56 v11.21,25.56
  Bottom 0.102: v11.21,25.56 11.21,27.24 12.32,28.35 15.98,28.35 16.32,28.01 23.26,28.01 v23.53,28.28
P22
  Top 0.102: 9.68,24.79 8.89,24 5.91,24 5.1,23.2 4.1,23.2 2.94,22.04 2.94,21.16 2.57,20.79 HDR1.9
  Top 0.152: MCU.B2 10.55,25.17 10.17,24.79 9.68,24.79
P24
  Top 0.102: 9.1,25.58 9.05,25.58 8.75,25.27 5.91,25.27 5.72,25.08 5.72,24.17 5,23.45 3.99,23.45 2.64,22.09 1.57,22.09 HDR1.7
  Top 0.152: MCU.B1 10.55,25.96 10.17,25.58 9.1,25.58
P25_AIN4
  Top 0.102: MCU.B0 11.08,26.77 11.85,27.55 11.85,27.83 12.6,28.57 13.08,28.57 13.33,28.82 13.9,28.82 14.21,29.13 15.7,29.13 16,28.83 17.15,28.83 17.16,28.83 17.17,28.83 17.62,28.38 21.76,28.38 23.07,27.07 23.07,23.86 23.73,23.2 HDR2.6
P26_AIN5
  Top 0.102: 9.83,26.39 9.74,26.49 5.88,26.49 5.86,26.47 3.18,26.47 2.58,25.87 HDR1.1
  Top 0.152: MCU.C1 11.18,26.39 9.83,26.39
P27_AIN6
  Top 0.102: MCU.C0 11.61,26.94 12.11,27.44 12.11,27.72 12.71,28.32 13.18,28.32 13.43,28.57 14,28.57 14.31,28.87 15.6,28.87 15.89,28.58 17.06,28.58 17.51,28.13 21.64,28.13 22.81,26.95 22.81,22.72 23.6,21.92 23.61,21.93 HDR2.8
P28_AIN7  (via drill 0.2)
  Top 0.102: 15.22,26.74 15.22,26.93 15.57,27.28 16.39,27.28 16.83,26.84 20.42,26.84 21.06,26.21 v21.06,26.17 | v23.56,26.69 23.36,26.5 23.36,25.08 23.97,24.47 HDR2.4
  Top 0.152: MCU.F1 14.08,26.05 14.34,26.05 14.69,26.39 14.97,26.39 15.22,26.64 15.22,26.74
  Bottom 0.102: v21.06,26.17 21.17,26.17 21.64,26.64 23.51,26.64 v23.56,26.69
P29  (via drill 0.2)
  Top 0.102: 14.21,26.35 14.46,26.6 14.46,26.92 14.5,26.97 14.5,27.57 14.79,27.85 15.16,27.85 15.48,27.54 16.5,27.54 16.92,27.11 20.89,27.11 v21.17,26.83 | R2.1 24.12,28.7 24.82,28.01 24.82,26.97 v24.57,26.72
  Top 0.152: MCU.E1 13.46,25.96 13.85,26.35 14.21,26.35
  Bottom 0.102: v21.17,26.83 21.17,26.86 21.21,26.9 23.11,26.9 23.37,27.17 23.76,27.17 24.2,26.72 v24.57,26.72
P30
  Top 0.102: 15.44,26.34 17.18,26.34 17.42,26.59 20.29,26.59 20.57,26.31 20.57,25.83 21.38,25.01 21.38,20.74 20.03,19.39 HDR2.11
  Top 0.152: MCU.G1 15.06,25.96 15.44,26.34
P102
  Top 0.102: 10.39,21.02 10.39,19.95 9,18.56 9,17.83 8.15,16.98 HDR1.16
  Top 0.152: MCU.C5 11.2,22.35 10.64,22.35 10.39,22.11 10.39,21.02
P103  (via drill 0.2)  (1 unrouted)
  Top 0.102: MCU.E6 13.57,21.62 | 13.41,21.78 13.6,21.59 v13.6,21.56 | v4.77,23.92 4.74,23.89 3.22,23.89 2.66,23.33 HDR1.5
  Bottom 0.102: v13.6,21.56 12.65,21.56 12.21,21.11 11.81,21.11 10.08,22.84 5.38,22.84 4.77,23.46 v4.77,23.92
P104
  Top 0.102: HDR1.2 8.31,25.87 8.41,25.96
  Top 0.152: MCU.A1 10,25.95 8.42,25.95 8.41,25.96 8.4,25.96
P105
  Top 0.102: MCU.A6 9.65,21.61 9.65,20.5 8.6,19.46 8.54,19.52 HDR1.12
P106
  Top 0.102: MCU.A7 10,21.15 10,20.03 8.21,18.25 HDR1.14
P109
  Top 0.102: MCU.A0 9.98,26.74 4.12,26.74 3.27,27.59 R26.1
P110
  Top 0.102: 15.83,25.55 15.98,25.55 16.14,25.4 16.62,25.4 17.55,26.32 20.19,26.32 20.32,26.2 20.32,25.72 21.12,24.92 21.12,21.78 20,20.66 HDR2.9
  Top 0.152: MCU.G2 15.06,25.17 15.44,25.55 15.83,25.55
P111
  Top 0.152: MCU.H2 15.97,25.17 16.02,25.12 17.28,25.12 17.93,24.47 HDR2.3
P113
  Top 0.102: 15.92,24.75 15.91,24.74
  Top 0.152: MCU.G3 15.19,24.74 15.91,24.74 16.71,24.74 18.26,23.2 HDR2.5
P114
  Top 0.102: 16.51,24.37 17.49,23.39 17.49,22.67 18.23,21.93 18.62,21.93
  Top 0.152: MCU.H3 16.51,24.37 | HDR2.7 18.62,21.93
P115
  Top 0.102: 16.49,23.47 16.92,23.05 16.92,22.25 17.18,21.98 17.18,14.64 17.51,14.31 HDR2.19
  Top 0.152: MCU.H4 15.77,23.57 15.88,23.47 16.49,23.47
PGOOD  (via drill 0.2)
  Top 0.102: MCU.D6 12.8,21.57 12.8,19.19 12.01,18.4 12.01,13.85 11.5,13.34 11.5,11.36 12.62,10.23 R28.2
  Top 0.152: U5.7 17.08,1.7 17.08,0.94 16.89,0.74 14.68,0.74 13.43,1.99 v13.43,2.65 | v12.39,6.78 11.77,6.78 11.09,7.46 11.09,8.61 11.2,8.71 12.62,8.71 R28.2 12.47,9.08
  Bottom 0.152: v13.43,2.65 13.41,2.65 12.77,3.28 12.77,3.99 11.82,4.94 11.82,6.26 12.34,6.78 v12.39,6.78
RESET  (via drill 0.2)
  Top 0.102: v13.72,8.56 13.63,8.56 R24.1 | 13.57,26.59 13.57,27.63 13.75,27.8 14.33,27.8 14.63,28.11 15.27,28.11 15.58,27.8 16.69,27.8 17.13,27.36 21.28,27.36 21.83,26.81 v21.83,26.18 22.03,25.98 22.03,19.78 23.69,18.12 HDR2.14
  Top 0.152: 13.57,26.59 13.37,26.39 13.1,26.39 12.78,26.07 12.78,25.55 MCU.D2
  Bottom 0.102: v13.72,8.56 14.02,8.56 14.98,9.52 18.01,9.52 18.25,9.76 22.03,9.76 22.18,9.91 22.18,9.94 22.18,10.11 22.67,10.6 23.23,10.6 23.77,10.07 25.89,10.07 25.89,23.62 23.34,26.18 v21.83,26.18
SCLK  (via drill 0.2)
  Top 0.102: HDR2.13 19.87,18.12 19.96,18.21
  Top 0.152: MCU.E2 13.6,24.78 v13.6,24.76 | v21.43,17.12 21.06,17.12 19.96,18.21
  Bottom 0.152: v13.6,24.76 13.6,24.07 15.54,22.14 17.08,22.14 17.2,22.25 17.2,23.58 18.37,24.75 21.14,24.75 22.25,24.75 23.05,23.95 23.53,23.95 24.62,22.86 24.62,18.22 23.69,17.29 21.6,17.29 v21.43,17.12 21.21,16.9 20.26,16.9 19.27,15.91 18.5,15.91 U4.19
SWDCLK
  Top 0.102: 12.02,26.52 12.02,26.99 12.37,27.34 12.37,27.63 12.81,28.07 13.29,28.07 13.54,28.31 14.11,28.31 14.41,28.62 15.49,28.62 15.79,28.32 16.96,28.32 17.41,27.87 21.52,27.87 22.56,26.84 22.56,21.69 23.61,20.64 23.63,20.66 HDR2.10
  Top 0.152: 12.02,26.52 12.02,26.34 MCU.D1
SWDIO
  Top 0.102: MCU.D0 12.63,27 12.63,27.52 12.92,27.81 13.39,27.81 13.64,28.06 14.21,28.06 14.52,28.36 15.38,28.36 15.68,28.06 16.86,28.06 17.3,27.62 21.41,27.62 22.29,26.73 22.29,20.75 23.65,19.39 HDR2.12
SYNC/RESET  (via drill 0.2)
  Top 0.152: v13.57,22.4 MCU.E5
  Bottom 0.152: v13.57,22.4 13.8,22.4 15.02,21.17 17.48,21.17 18.15,21.84 18.15,23.21 18.77,23.84 21.85,23.84 22.67,23.01 23.18,23.01 23.7,22.49 23.7,18.65 23.36,18.31 17.17,18.31 17.12,18.37 17.07,18.33 U4.16
TS
  Top 0.152: U5.1 15.31,4.03 R27.2
VDD  (via drill 0.2)
  Top 0.152: MCU.G4 14.86,23.57 15.24,23.95 15.82,23.95 15.94,23.84 16.6,23.84 17.21,23.23 17.21,22.4 17.47,22.14 17.47,15.11 17.61,14.97 20.55,14.97 21.03,15.45 21.47,15.45 21.88,15.04 v21.88,14.65 v21.88,14.64 21.88,12.81 20.98,11.9 19.43,11.9 U1.5 | C7.2 16.38,11.87 17.13,11.87 C9.2 17.25,11.91 | HDR2.18 23.53,15.58 v23.21,15.25 | C23.2 17.35,13.04 | v16.07,10.53 15.85,10.53 15.21,11.17 R25.2 16.66,12.4 17.15,11.91 17.25,11.91 | 17.25,11.91 17.25,11.74 17.75,11.24 18.69,11.24 18.99,11.54 18.99,11.94 18.56,12.36 U1.5 | C23.2 17.41,13.05 | U1.5 18.28,13.05 C23.2
  Bottom 0.152: R30.2 20.36,14.45 21.68,14.45 v21.88,14.65 22.49,15.25 v23.21,15.25 | U4.26 16.53,11.01 16.13,10.61 16.13,10.53 v16.07,10.53
VDDH  (via drill 0.2)
  Top 0.102: R28.1 12.55,8.14
  Top 0.152: MCU.F6 14.43,21.54 14.97,21.54 15.21,21.3 15.21,20.82 12.58,18.19 12.58,12.37 R25.1 12.61,10.99 13.46,10.14 13.46,9.92 R24.2 14.41,8.97 14.41,8.23 v14.71,7.93 | R28.1 | v13.13,6.79 13.13,7.16 12.7,7.59 12.7,8.14 12.55,8.14 R29.1
  Bottom 0.152: v14.71,7.93 13.57,6.79 v13.13,6.79 | v13.13,6.79
VIN  (via drill 0.2)
  Top 0.152: C8.2 23.27,11.61 25.72,9.16 25.72,6.49 S1.2 | v21.02,18.79 21.02,18.29 22.69,16.62 22.69,12.5 C8.2 | U1.1 18.65,10.26 18.65,10.67 19.13,11.14 19.94,11.14 20.47,10.61 U1.3 20.47,10.61 21.46,11.61 C8.2
  Bottom 0.152: U3.1 22.18,21.58 22.42,21.58 22.58,21.42 22.58,20.7 22.42,20.54 22.18,20.54 U3.3 | U3.3 21.62,19.97 C5.1 21.64,19.13 22.05,18.73 23.11,18.73 23.29,18.91 C24.2 | U3.3 21.01,20.11 20.17,19.27 R31.2 20.27,18.79 v21.02,18.79
VSWITCH  (via drill 0.2)
  Top 0.152: U5.10 18.31,2.92 19.12,2.92 19.6,3.4 | v19.68,3.41 19.7,3.41 19.71,3.4 | 19.71,3.4 19.6,3.4 | 19.6,3.4 18.36,3.4 18.36,3.41 U5.11 | U5.5 15.81,2.03 14.99,2.03 v14.8,1.84 14.23,1.84 C11.2 | S1.3 20.63,3.4 19.71,3.4
  Bottom 0.152: v14.8,1.84 14.8,1.22 14.96,1.05 19.53,1.05 20.19,1.71 20.19,2.9 v19.68,3.41

## Text on the board
tPlace: MCU
bPlace: BC40M + ADS131M08 / Joshua Brewster / Bojan Jovanovich / AGPL v3 License
tNames: P26 | P104 | P10 | P9 | P16 | P20 | P111 | P28 | P103 | P17 | P113 | P25 | P24 | P15 | P114 | P27 | P22 | P13 | P110 | SWDIO | 18 | 105 | P18 | P105 | SCLK | P30 | SWCLK | P14 | P106 | 14 | 106 | SCLK | RST | P5 | P102 | 5 | 102 | DOUT | DOUT | P4 | P12 | 4 | 12 | DIN | GND | P7 | DIN | 3.3V | 6 | P6 | 115 | P115 | 8.192M | 7 | G | V
bNames: 26 | 104 | 10/MISO | 9/MOSI | 16 | 20 | 17 | 111 | 28 | 103 | 114 | 113 | 25 | 24 | 15 | 27 | 22 | 13 | 110 | SWDCLK | 7+ | 7- | 30 | SWDIO | RESET | GND | 3.3V | 8.192M | 0+ | 0-
Measures: Notes: / - Minimize space without jeopardizing grounding for the external ADC / i.e. be keen with ground plane traces and electron flow. / - Break out all unused programmable pins plus ADC inputs. / ADC inputs may have to be a (CHEAP) SMT connector backside to minimize possible interference from the radio, / but let's just break them out first and test. Let's still ID a 16-20 pin connector.
Document: SWO | SWDCLK | RESET | SWDIO | GND | VDD